# Altium PCB kd_inz_pcb.PcbDoc
Units mm, origin at the board's own origin, x right, y up, seen from the top; angles counter-clockwise.
Board outline 27 x 25 mm, 4 copper layers (Top Layer, Int1 (GND), Int2 (PWR), Bottom Layer), stack 1.369 mm thick; 54 components, 46 nets, 223 pads, 109 vias.
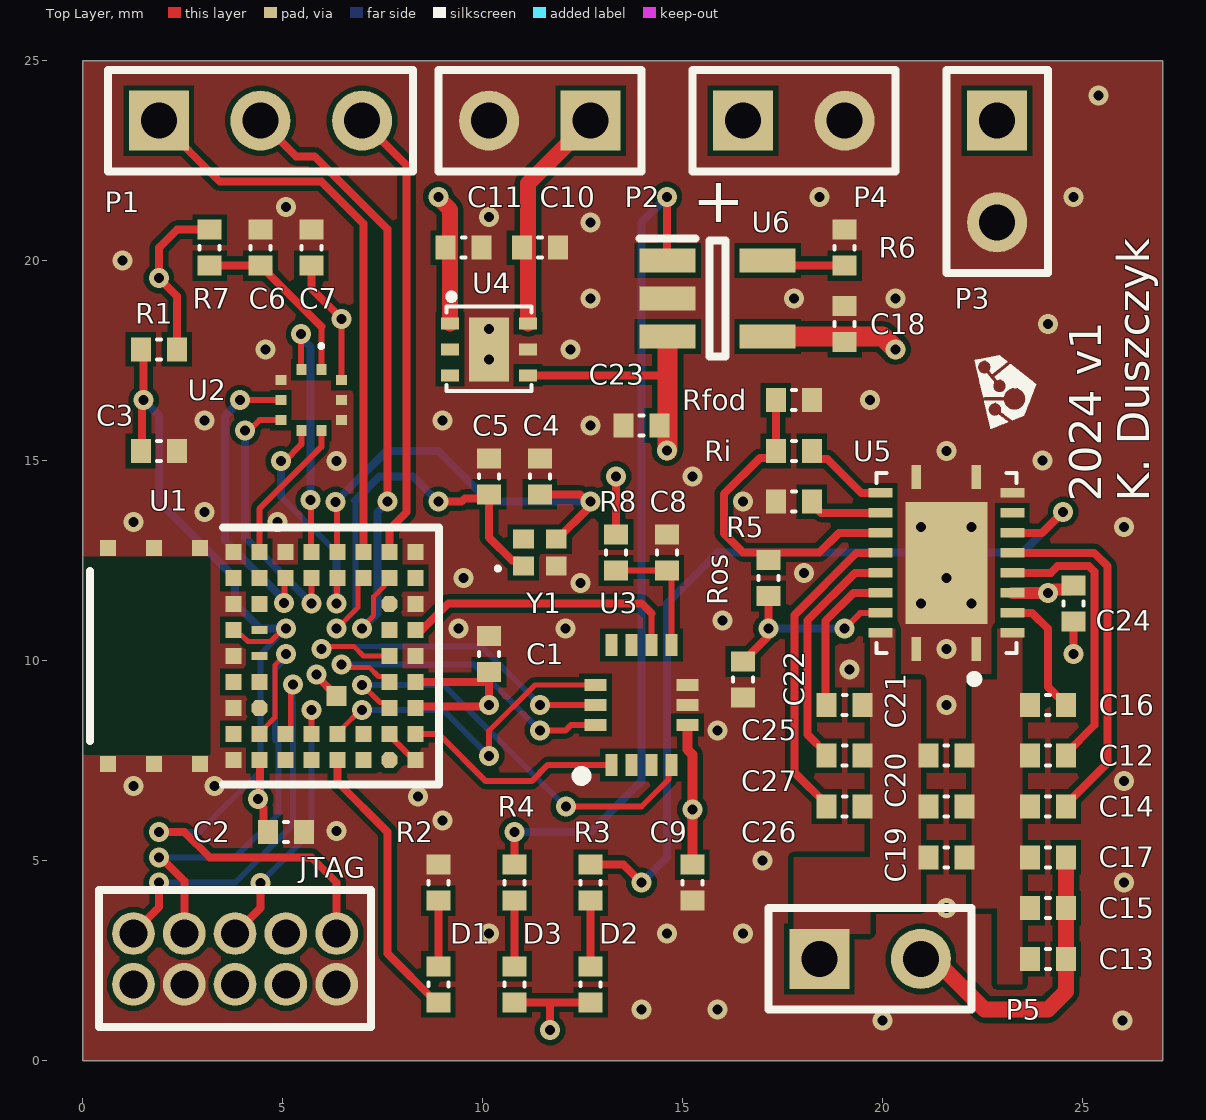
[diagram p0: Top Layer view]
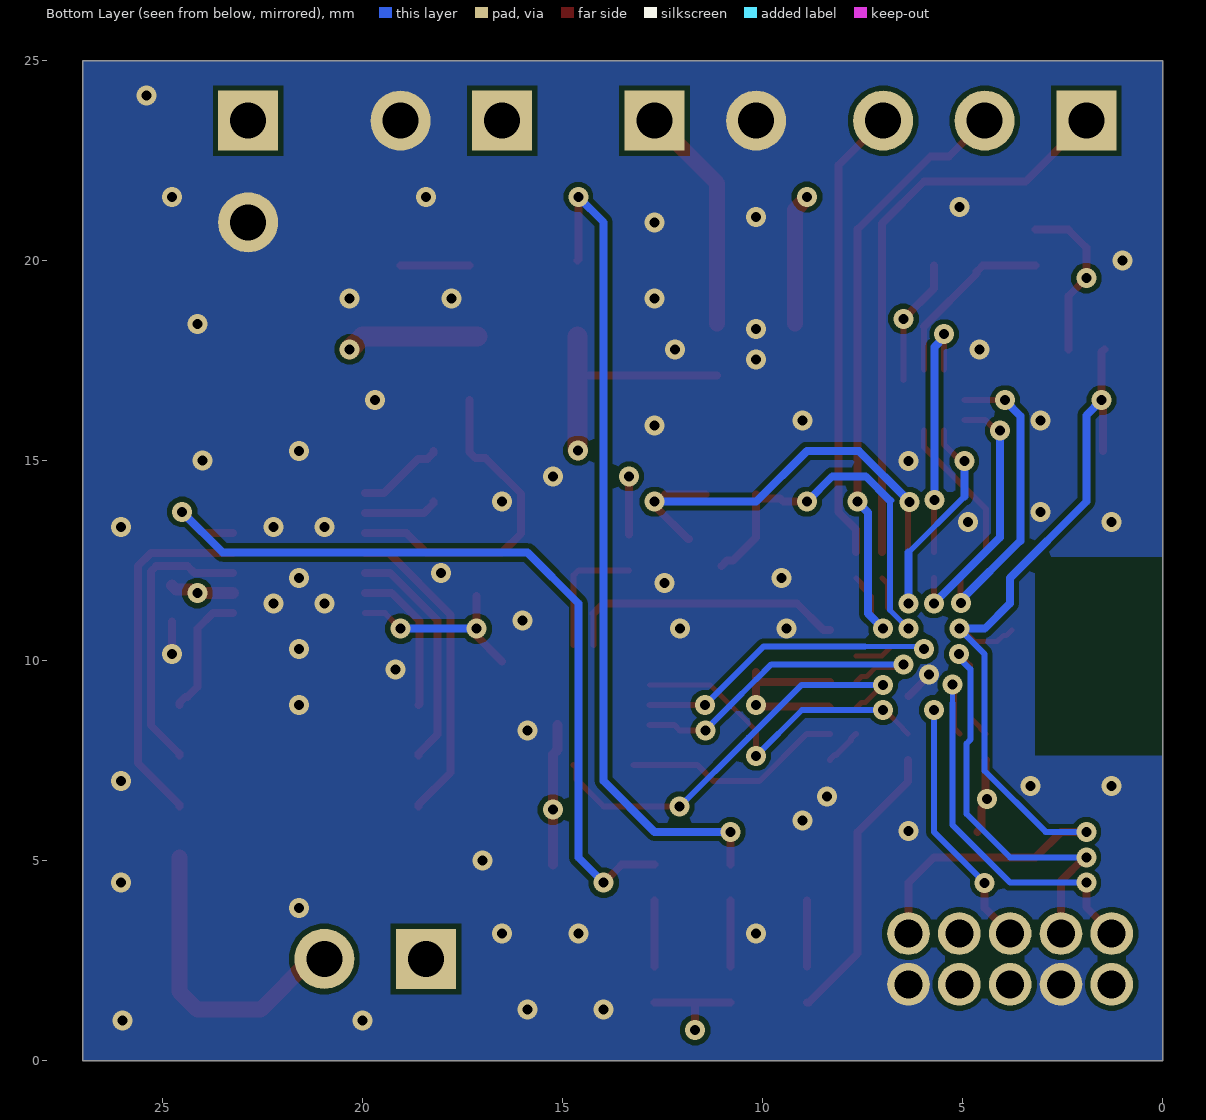
[diagram p1: Bottom Layer view, seen from below]
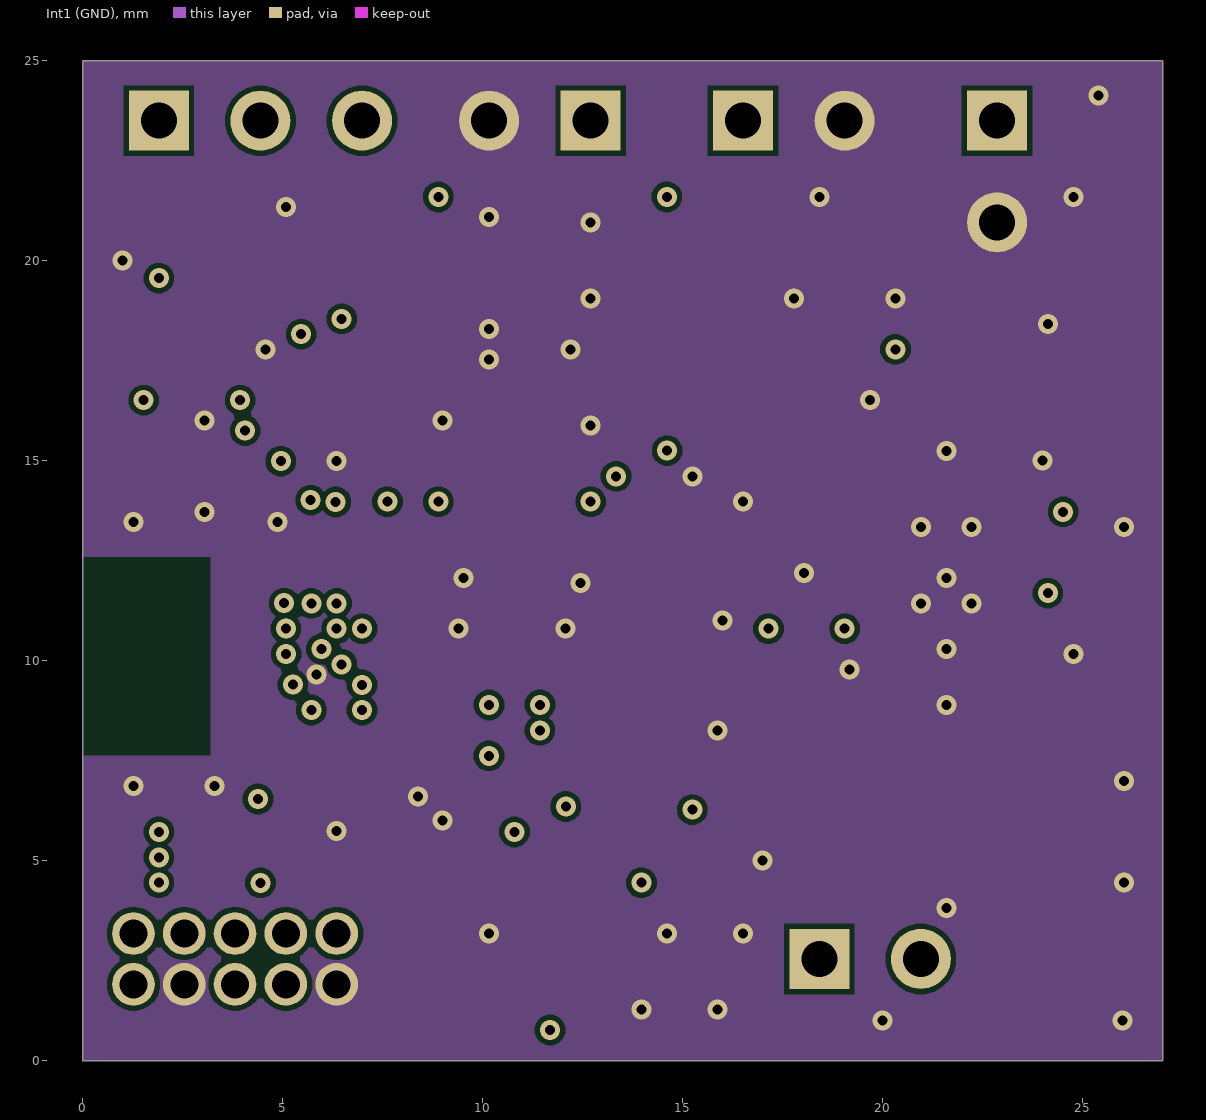
[diagram p2: Int1 (GND)]
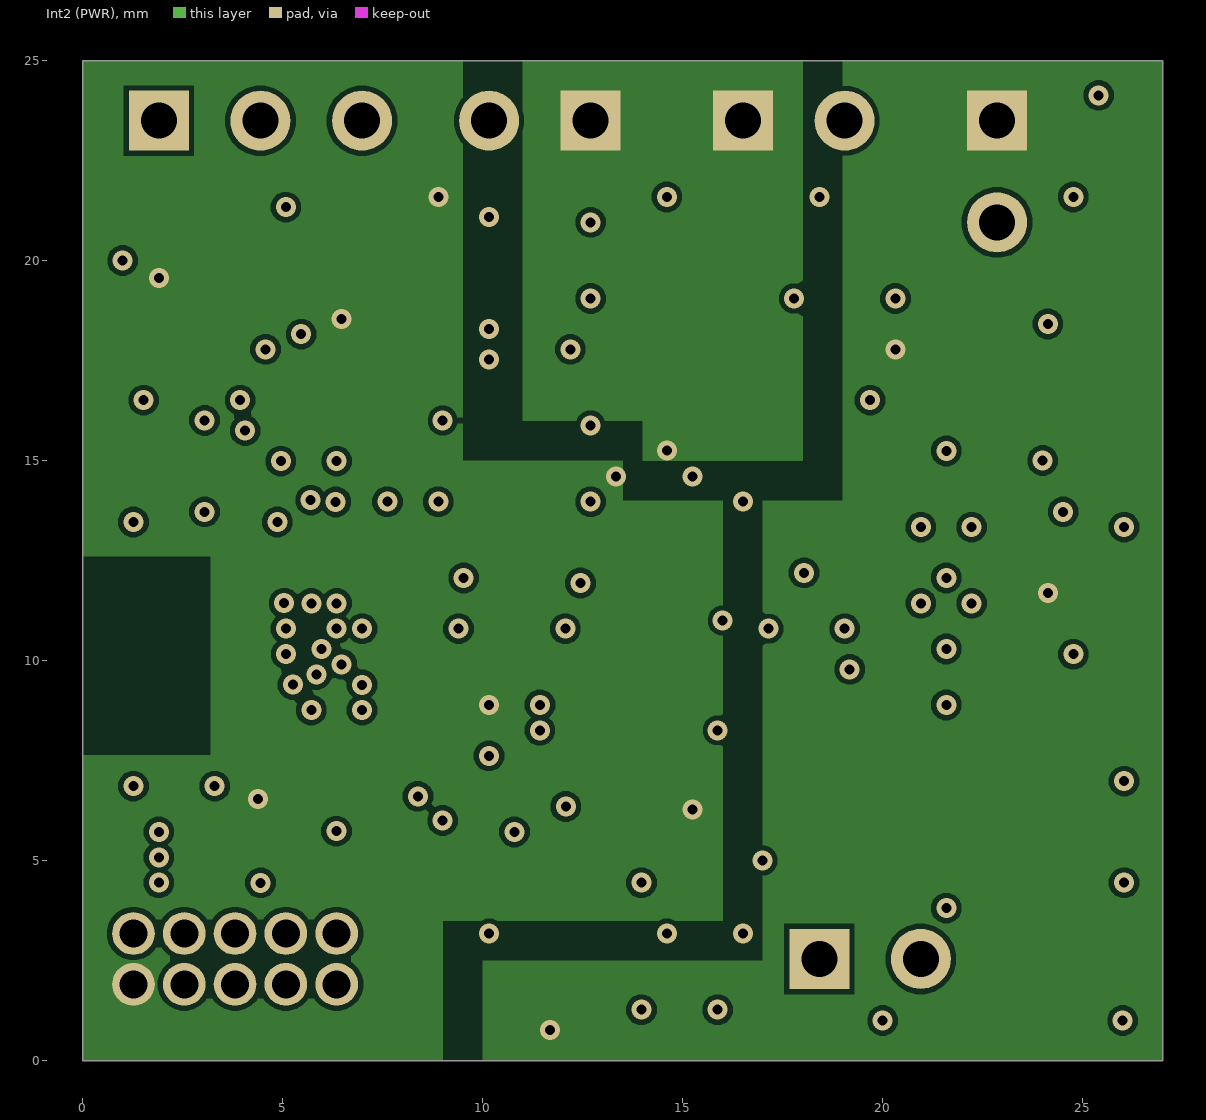
[diagram p3: Int2 (PWR)]

## Layer stack, top to bottom
Top Solder: solder mask 0.0254, SM-001, Dk 4
Top Layer: signal copper 0.035
Dielectric 2: prepreg 0.1295, PP-017, Dk 4.3
Dielectric 4: prepreg 0.1295, PP-017, Dk 4.3
Int1 (GND): signal copper 0.035
Dielectric 1: core 0.7112, Core-039, Dk 4.8
Int2 (PWR): signal copper 0.035
Dielectric 5: prepreg 0.1295, PP-017, Dk 4.3
Dielectric 3: prepreg 0.1295, PP-017, Dk 4.3
Bottom Layer: signal copper 0.035
Bottom Solder: solder mask 0.0254, SM-001, Dk 4

## Board outline
0,0 27,0 27,25 0,25

## Design rules (kind name [scope] priority, off if disabled: settings)
Clearance [All] p1: gap=0.127 ignorepadtopadclearanceinfootprint=FALSE
PolygonConnect [All] p1: connectstyle=Direct reliefconductorwidth=0.254 reliefentries=4 polygonreliefangle="90 Angle" airgapwidth=0.254
RoutingVias [All] p1: holewidth=0.711 width=1.27 viastyle="Through Hole" minholewidth=0.2 minwidth=0.5 maxholewidth=0.711 maxwidth=1.27
SolderMaskExpansion [All] p1: expansion=0.102 istentingtop=FALSE
Width [All] p1: maxlimit=1 minlimit=0.127 preferedwidth=0.3
30 further rules are at their usual default settings.

## Classes and differential pairs
component class kd_inz_supply: C10 C11 C12 C13 C14 C15 C16 C17 C18 C19 C20 C21 C22 C23 C24 C25 C26 C27 D2 D3 P2 P3 P4 P5 R3 R4 R5 R6 Rfod Ri Ros U4 U5 U6
component class kd_inz_mems: C6 C7 C8 C9 R7 R8 U2 U3
component class kd_inz_BL653: C1 C2 C3 C4 C5 D1 JTAG P1 R1 R2 U1 Y1

## Components (designator, comment, footprint, x,y, rotation, side; value= is the part's Value field where it differs from the comment)
C1 "1u" 0402 10.16,10.16 r90 top
C2 "1u" 0402 5.08,5.715 r0 top
C3 "100n" 0402 1.905,15.24 r0 top
C4 "12p" 0402 11.43,14.605 r90 top
C5 "12p" 0402 10.16,14.605 r90 top
C6 "100n" 0402 4.445,20.32 r270 top
C7 "100n" 0402 5.715,20.32 r90 top
C8 "100n" 0402 14.605,12.7 r90 top
C9 "100n" 0402 15.24,4.445 r270 top
C10 "10u" 0402 11.43,20.32 r0 top
C11 "10u" 0402 9.525,20.32 r0 top
C12 "0u47" 0402 24.13,7.62 r0 top
C13 "C1" 0402 24.13,2.54 r0 top
C14 "22n" 0402 24.13,6.35 r180 top
C15 "C1" 0402 24.13,3.81 r0 top
C16 "10n" 0402 24.13,8.89 r180 top
C17 "C1" 0402 24.13,5.08 r0 top
C18 "4u7" 0402 19.05,18.415 r90 top
C19 "C2" 0402 21.59,5.08 r180 top
C20 "C2" 0402 21.59,6.35 r180 top
C21 "C2" 0402 21.59,7.62 r180 top
C22 "10u" 0402 16.51,9.525 r270 top
C23 "4u7" 0402 13.97,15.875 r180 top
C24 "1u" 0402 24.765,11.43 r270 top
C25 "10n" 0402 19.05,8.89 r0 top
C26 "22n" 0402 19.05,6.35 r0 top
C27 "0u47" 0402 19.05,7.62 r0 top
D1 "Debug LED" 0402 8.89,1.905 r90 top
D2 "Qi LED" 0402 12.7,1.905 r90 top
D3 "MCP LED" 0402 10.795,1.905 r90 top
JTAG "Cortex Debug Conn_UART" "Cortex Debug Connector - THT" 3.81,2.54 r90 top
P1 "UART Header" HDR1X3 1.905,23.495 r0 top
P2 "Emergency charger input" HDR1X2 12.7,23.495 r180 top
P3 "Emergency charger input" HDR1X2 22.86,23.495 r270 top
P4 "Battery" BAT-2 17.78,23.495 r0 top
P5 "RX Coil" HDR1X2 18.415,2.54 r0 top
R1 "100k" 0402 1.905,17.78 r0 top
R2 "470" 0402 8.89,4.445 r90 top
R3 "100" 0402 12.7,4.445 r90 top
R4 "470" 0402 10.795,4.445 r90 top
R5 "10k" 0402 17.78,13.97 r180 top
R6 "15k" 0402 19.05,20.32 r270 top
R7 "56" 0402 3.175,20.32 r270 top
R8 "56" 0402 13.335,12.7 r270 top
Rfod "196" 0402 17.78,16.51 r180 top
Ri "845" 0402 17.78,15.24 r0 top
Ros "20k" 0402 17.145,12.065 r270 top
U1 "BL653u" FP-453-00059R-MFG 4.545,10.115 r90 top
U2 "BMP390" BMP390 5.715,16.51 r0 top
U3 "BMI270" QFN50P300X250X87-14N 13.97,8.89 r90 top
U4 "LP5912-3.3DRVR" WSON-6 10.16,17.78 r0 top
U5 "BQ51013BRHLR" BQ51050BRHLR 21.59,12.065 r180 top
U6 "MCP73831T-2ACI_OT" SOT95P270X145-5N 15.875,19.05 r0 top
Y1 "ECS-.327-12.5--1210B-N-TR" ECS3271251210BNTR 11.43,12.7 r0 top

## Footprints (in the part's own frame and the unit in brackets; to place one, negate y for a bottom-side part, rotate by r counter-clockwise, add the part's x,y. Pads: shape width x height; smd on the part's side, far side on the other; paste and mask are expansions set on the pad)
0402 [mm]
  rect 0.5x0.6 smd: 1(0.45,0) 2(-0.45,0)
  silkscreen extent -0.05,-0.25 0.05,0.25
BAT-2 [mm] "Battery; 2 Leads"
  rect 1.5x1.5 hole 0.9: 1(-1.27,0)
  round 1.5 hole 0.9: 2(1.27,0)
  silkscreen extent -2.54,-1.27 2.54,1.27
BMP390 [mm]
  rect 0.25x0.275 smd: 1(0.25,0.763) 2(-0.25,0.763) 6(-0.25,-0.763) 7(0.25,-0.763)
  rect 0.275x0.25 smd: 3(-0.762,0.5) 4(-0.762,0) 5(-0.762,-0.5) 8(0.762,-0.5) 9(0.762,0) 10(0.762,0.5)
  silkscreen extent 0.2,1.3 0.3,1.4, body extent -1,-1.08 1,0.92, height 0.73
BQ51050BRHLR [mm]
  rect 0.24x0.6 smd: 1(-0.75,1.775) 10(-0.75,-2.525) 11(0.75,-2.525) 20(0.75,1.775)
  rect 0.6x0.24 smd: 2(-1.65,1.375) 3(-1.65,0.875) 4(-1.65,0.375) 5(-1.65,-0.125) 6(-1.65,-0.625) 7(-1.65,-1.125) 8(-1.65,-1.625) 9(-1.65,-2.125) 12(1.65,-2.125) 13(1.65,-1.625) 14(1.65,-1.125) 15(1.65,-0.625) 16(1.65,-0.125) 17(1.65,0.375) 18(1.65,0.875) 19(1.65,1.375)
  rect 2.05x3.05 smd: 21(0,-0.375)
  silkscreen extent -1.75,-2.63 1.75,2.62, body extent -1.75,-2.67 1.75,1.83, height 1
"Cortex Debug Connector - THT" [mm]
  round 1.067 hole 0.7: 1(-0.635,2.54) 2(0.635,2.54) 3(-0.635,1.27) 4(0.635,1.27) 5(-0.635,0) 6(0.635,0) 7(-0.635,-1.27) 8(0.635,-1.27) 9(-0.635,-2.54) 10(0.635,-2.54)
  silkscreen extent -1.7,-3.4 1.73,3.4
ECS3271251210BNTR [mm]
  rect 0.52x0.47 smd: 1(-0.41,-0.335) 2(0.41,-0.335) 3(0.41,0.335) 4(-0.41,0.335)
  silkscreen extent -1.1,-0.45 -1,-0.35, body extent -0.62,-0.52 0.62,0.52, height 0.45
FP-453-00059R-MFG [mm]
  rect 0.4x0.4 smd paste+0 mask+0: 1(-2.6,0.78) 2(-1.95,0.78) 3(-1.3,0.78) 4(-0.65,0.78) 5(0,0.78) 6(0.65,0.78) 7(1.3,0.78) 8(1.95,0.78) 9(2.6,0.78) 10(2.6,0.13) 11(2.6,-0.52) 12(2.6,-1.17) 13(2.6,-1.82) 14(2.6,-2.47) 15(2.6,-3.12) 16(2.6,-3.77) 17(1.95,-3.77) 18(1.3,-3.77) 19(0.65,-3.77) 20(0,-3.77) 21(-0.65,-3.77) 22(-1.3,-3.77) 23(-1.95,-3.77) 24(-2.6,-3.77) 26(-2.6,-2.47) 27(-2.6,-1.82) 28(-2.6,-1.17) 29(-2.6,-0.52) 30(-2.6,0.13) 31(-1.95,0.13) 33(-0.65,0.13) 36(1.3,0.13) 37(1.95,0.13) 38(1.95,-0.52) 39(1.95,-1.17) 40(1.95,-1.82) 41(1.95,-2.47) 42(1.95,-3.12) 44(0.65,-3.12) 45(0,-3.12) 46(-0.65,-3.12) 47(-1.3,-3.12) 48(-1.95,-3.12) 49(-1.95,-2.47) 50(-1.95,-1.82) 51(-1.95,-1.17) 52(-1.95,-0.52) G2(2.7,3.91) G3(2.7,2.76) G4(2.7,1.61) G5(-2.7,1.61) G6(-2.7,2.76) G7(-2.7,3.91)
  oct 0.4x0.4 smd paste+0 mask+0: 25(-2.6,-3.12) 32(-1.3,0.13) 43(1.3,-3.12)
  rect 0.203x0.4 smd paste+0 mask+0: 34(0,0.13) 35(0.65,0.13)
  rect 0.5x0.5 smd paste+0 mask+0: G1(-1,-1.8)
  silkscreen extent -3.21,-4.37 3.21,4.37
HDR1X2 [mm] "Connector; Header; 2 Position"
  rect 1.5x1.5 hole 0.9: 1(0,0)
  round 1.5 hole 0.9: 2(2.54,0)
  silkscreen extent -1.27,-1.27 3.81,1.27
HDR1X3 [mm] "Connector; Header; 3 Position"
  rect 1.5x1.5 hole 0.9: 1(0,0)
  round 1.5 hole 0.9: 2(2.54,0) 3(5.08,0)
  silkscreen extent -1.27,-1.27 6.35,1.27
QFN50P300X250X87-14N [mm]
  rect 0.55x0.3 smd: 1(-1.5,0.75) 2(-1.5,0.25) 3(-1.5,-0.25) 4(-1.5,-0.75) 8(1.5,-0.75) 9(1.5,-0.25) 10(1.5,0.25) 11(1.5,0.75)
  rect 0.3x0.55 smd: 5(-0.5,-1.15) 6(0,-1.15) 7(0.5,-1.15) 12(0.5,1.15) 13(0,1.15) 14(-0.5,1.15)
  silkscreen extent -1.9,1.37 -1.65,1.62, body extent -1.55,-1.3 1.55,1.3, height 0.87
SOT95P270X145-5N [mm]
  rect 1.4x0.6 smd: 1(-1.25,0.95) 2(-1.25,0) 3(-1.25,-0.95) 4(1.25,-0.95) 5(1.25,0.95)
  silkscreen extent -1.95,-1.45 0.2,1.5, body extent -1.35,-1.45 1.35,1.45, height 1.45
WSON-6 [mm]
  rect 0.45x0.3 smd: 1(-0.975,0.65) 2(-0.975,0) 3(-0.975,-0.65) 4(0.975,-0.65) 5(0.975,0) 6(0.975,0.65)
  rect 1x1.6 smd: 7(0,0)
  silkscreen extent -1.07,-1.04 1.07,1.4

## Part data
C1 C2 C3 C4 C5 C6 C7 C8 C9 C10 C11 C12 C13 C14 C15 C16 C17 C18 C19 C20 C21 C22 C23 C24 C25 C26 C27: library part C, "Capacitor"
D1 D2 D3: library part LED
P1: library part "Header 3", "Header, 3-Pin", LatestRevisionDate=17-Jul-2002, LatestRevisionNote="Re-released for DXP Platform.", Publisher="Altium Limited"
P2 P3 P5: library part "Header 2", "Header, 2-Pin", LatestRevisionDate=17-Jul-2002, LatestRevisionNote="Re-released for DXP Platform.", Publisher="Altium Limited"
P4: "Multicell Battery", LatestRevisionDate=17-Jul-2002, LatestRevisionNote="Re-released for DXP Platform.", PackageDescription="Battery; 2 Leads", PackageReference=BAT-2, Published=24-Mar-1999, Publisher="Altium Limited"
R1 R2 R3 R4 R5 R6 R7 R8 Rfod Ri Ros: library part R, "Resistor"
U1: "BL653 MOD INTEGRATED ANT"
U2: "Integrated Circuit", Manufacturer_Name=BOSCH, Mouser Part Number=262-BMP390, Arrow Part Number=BMP390, Arrow Price/Stock=https://www.arrow.com/en/products/bmp390/bosch?region=nac, Datasheet Link=https://www.bosch-sensortec.com/media/boschsensortec/downloads/datasheets/bst-bmp390-ds002.pdf, Height=0.8mm, Manufacturer_Part_Number=BMP390, Mouser Price/Stock=https://www.mouser.co.uk/ProductDetail/Bosch-Sensortec/BMP390?qs=QNEnbhJQKvYQVfvRMgo2YA%3D%3D
U3: "Integrated Circuit", Manufacturer_Name=BOSCH, Mouser Part Number=262-BMI270, Arrow Part Number=BMI270, Arrow Price/Stock=https://www.arrow.com/en/products/bmi270/bosch?region=nac, Datasheet Link=https://www.mouser.de/datasheet/2/783/BST-BMI270-FL000-1530947.pdf, Height=0.87mm, Manufacturer_Part_Number=BMI270, Mouser Price/Stock=https://www.mouser.co.uk/ProductDetail/Bosch-Sensortec/BMI270?qs=u16ybLDytRYIj%252BjQEee88A%3D%3D
U4: library part LP5912
U5: "Integrated Circuit", Manufacturer_Name="Texas Instruments", Mouser Part Number=595-BQ51013BRHLR, Arrow Part Number=BQ51013BRHLR, Arrow Price/Stock=https://www.arrow.com/en/products/bq51013brhlr/texas-instruments?region=nac, Datasheet Link=http://www.ti.com/lit/ds/symlink/bq51013b.pdf, Manufacturer_Part_Number=BQ51013BRHLR, Mouser Price/Stock=https://www.mouser.co.uk/ProductDetail/Texas-Instruments/BQ51013BRHLR?qs=y1vSg4rOnUJlN8ZPg6D5Pw%3D%3D
U6: "Integrated Circuit", Arrow Part Number=MCP73831T-2ACI/OT, Manufacturer_Name=Microchip, Mouser Part Number=579-MCP73831T-2ACIOT, Arrow Price/Stock=https://www.arrow.com/en/products/mcp73831t-2aciot/microchip-technology?region=nac, Datasheet Link=http://ww1.microchip.com/downloads/en/DeviceDoc/20001984g.pdf, Height=1.45mm, Manufacturer_Part_Number=MCP73831T-2ACI/OT, Mouser Price/Stock=https://www.mouser.co.uk/ProductDetail/Microchip-Technology/MCP73831T-2ACI-OT?qs=yUQqVecv4qvbBQBGbHx0Mw%3D%3D
Y1: "Crystal or Oscillator", Manufacturer_Name=ECS, Datasheet Link=https://4donline.ihs.com/images/VipMasterIC/IC/ECSI/ECSI-S-A0011101861/ECSI-S-A0011101861-1.pdf?hkey=EF798316E3902B6ED9A73243A3159BB0, Height=0.35mm, Manufacturer_Part_Number=ECS-.327-12.5--1210B-N-TR

## Via types
v1: diameter 0.5, hole 0.25, Top Layer to Bottom Layer, tented both sides, 109 vias

## Nets (pads, with @x,y where several pads share a name; then routed paths per layer and width w, separated by ;. In a path a pad name is that pad's centre, name@x,y a point inside that pad or via, vN(x,y) a via of type N, cw(c..) or ccw(c..) an arc to the next point about the centre after c; other vN are vias at no path point)
3V3: C1.2 C2.2 C7.2 C9.2 C11.2 JTAG.1 R1.1 R7.2 R8.2 U1.21 U1.22 U1.30 U2.10 U3.5 U4.1 | length 22.1
  Top Layer w0.15: U2.10 v1(6.477,18.542)
  Top Layer w0.2: R1.1 2.355,19.108 v1(1.905,19.558) 1.905,20.32 2.355,20.77 R7.2 ; v1@4.318,6.523 4.526,6.315 4.526,5.819 C2.2 ; v1(4.384,6.538) 4.43,6.585 4.43,7.5 U1.30 ; C7.2 5.715,19.304 v1(6.477,18.542) ; U1.22 8.353,8.852 10.122,8.852 v1(10.16,8.89) C1.2@10.16,9.465 ; U1.21 10.093,9.465 10.16,9.532 C1.2 ; R8.2 v1(13.335,14.605)
  Top Layer w0.25: U3.5 15.12,7.771 15.24,7.651 C9.2
  Top Layer w0.4: v1(8.89,21.59) 8.89,21.563 9.185,21.268 U4.1
  other v1: 15.24,6.273
5V_charger_input: C18.2 C24.2 D2.2 D3.2 P3.1 U5.4 U6.4 | length 7.5
  Top Layer w0.2: D3.2 11.684,1.455 ; v1(11.684,0.762) 11.684,1.455 ; D2.2 11.684,1.455
  Top Layer w0.3: U5.4 23.243,11.687 24.127,11.687 v1(24.13,11.684) 24.184,11.684 24.28,11.78 24.665,11.78 C24.2
  Top Layer w0.5: U6.4 20,18.1 v1(20.32,17.78)
AC1: C12.2 C13.2 C14.1 C15.2 C16.1 C17.2 C19.2 C20.2 C21.2 U5.2
AC2: C19.1 C20.1 C21.1 C25.1 C26.1 C27.1 P5.1 U5.19
BMI_INT1: U1.47 U3.4 | length 10.5
  Top Layer w0.127: v1(6.985,9.39) 6.993,9.39 7.431,8.951 7.528,8.951 U1.47
  Top Layer w0.15: v1(12.077,6.35) 13.97,6.35 14.645,7.025 14.645,7.315 U3.4
  Bottom Layer w0.15: v1(6.985,9.39) 9.021,9.39 10.341,8.07 10.345,8.07 12.065,6.35 v1(12.077,6.35)
BMI_INT2: U1.19 U3.9 | length 7.1
  Top Layer w0.15: U3.9 14.22,11.18
  Top Layer w0.2: U1.19 8.479,10.765 9.144,11.43 13.97,11.43 14.22,11.18
BMI_SPI_CLK: U1.45 U3.13 | length 9.3
  Top Layer w0.127: v1(5.969,10.287) 6.028,10.346 6.787,10.346 7.019,10.115 U1.45
  Top Layer w0.15: v1(11.433,8.893) 11.434,8.891 12.819,8.891 U3.13
  Bottom Layer w0.127: v1(5.969,10.287) 6.028,10.346 7.434,10.346
  Bottom Layer w0.15: 7.434,10.346 9.979,10.346 v1(11.433,8.893)
BMI_SPI_CS: U1.50 U3.12 | length 8.3
  Top Layer w0.127: U1.50 6.501,8.301 6.501,8.321 6.944,8.763 v1(6.985,8.763) ; v1(10.158,7.618) v1@10.16,7.62 ; 10.16,8.243 11.307,9.39 U3.12
  Top Layer w0.15: v1@10.16,7.62 10.16,8.243
  Bottom Layer w0.15: v1(6.985,8.763) 9.013,8.763 v1@10.156,7.62
BMI_SPI_MISO: U1.23 U3.1 | length 5.6
  Top Layer w0.15: U1.23 8.895,8.165 10.075,6.985 11.225,6.985 11.63,7.39 U3.1
BMI_SPI_MOSI: U1.46 U3.14 | length 8.5
  Top Layer w0.127: v1(6.477,9.906) 6.548,9.835 6.734,9.835 6.738,9.83 7.167,9.83 7.396,9.601 7.528,9.601 U1.46
  Top Layer w0.15: v1(11.43,8.255) 12.076,8.255 12.211,8.39 U3.14
  Bottom Layer w0.15: v1(6.477,9.906) 9.779,9.906 10.16,9.525 10.164,9.525 10.832,8.857 10.832,8.855 11.43,8.256 v1(11.43,8.255)
BMP_INT: U1.10 U2.7 | length 3.7
  Top Layer w0.15: U1.10 4.415,13.793 5.965,15.343 U2.7
BMP_SPI_CLK: U1.12 U2.2 | length 6.4
  Top Layer w0.15: v1(5.461,18.161) 5.463,18.159 5.463,17.275 U2.2 ; v1(5.701,14.011) 5.708,14.004 5.708,12.722 U1.12
  Bottom Layer w0.2: v1(5.461,18.161) 5.461,18.08 5.701,17.839 v1(5.701,14.011)
BMP_SPI_CS: U1.40 U2.6 | length 5.8
  Top Layer w0.15: v1(4.953,14.986) 5.048,14.986 5.465,15.403 U2.6 ; v1(6.35,11.43) 6.358,11.438 6.358,12.058 U1.40
  Bottom Layer w0.15: 4.953,14.097 6.35,12.7
  Bottom Layer w0.2: 4.953,14.097 v1(4.953,14.986) ; v1(6.35,11.43) 6.35,12.7
BMP_SPI_MISO: U1.39 U2.5 | length 6.6
  Top Layer w0.15: v1(4.064,15.748) 4.159,15.748 4.421,16.01 U2.5 ; v1(5.715,11.43) U1.39
  Bottom Layer w0.2: v1(4.064,15.748) 4.064,13.081 v1(5.715,11.43)
BMP_SPI_MOSI: U1.38 U2.4 | length 7.5
  Top Layer w0.15: v1(3.937,16.51) U2.4 ; v1(5.038,11.432) 5.052,11.445 5.052,12.052 U1.38
  Bottom Layer w0.2: v1(3.937,16.51) 3.937,16.497 3.556,16.116 3.556,12.994 5.038,11.511 v1(5.038,11.432)
BOOT1: C16.2 U5.3 | length 3.2
  Top Layer w0.2: U5.3 23.735,11.19 24.13,10.795 24.13,9.34 24.38,9.09 24.43,9.09 24.58,8.94 C16.2
BOOT2: C25.2 U5.17 | length 3.8
  Top Layer w0.2: C25.2 18.573,8.917 18.573,10.993 19.27,11.69 U5.17
CLAMP1: C12.1 U5.5 | length 7.1
  Top Layer w0.2: U5.5 24.204,12.19 24.371,12.357 25.159,12.357 25.292,12.224 25.292,8.382 24.58,7.67 C12.1
CLAMP2: C27.2 U5.16 | length 5.9
  Top Layer w0.2: C27.2 18.6,7.67 18.123,8.147 18.123,11.005 19.308,12.19 U5.16
COMM1: C14.2 U5.6 | length 9
  Top Layer w0.2: U5.6 25.288,12.69 25.619,12.359 25.619,7.439 24.58,6.4 C14.2
COMM2: C26.2 U5.15 | length 7.9
  Top Layer w0.2: C26.2 18.6,6.4 17.796,7.204 17.796,11.14 19.34,12.684 19.934,12.684 U5.15
GND: C1.1 C2.1 C3.1 C4.1 C5.1 C6.2 C7.1 C8.1 C9.1 C10.1 C11.1 C18.1 C22.1 C23.1 C24.1 JTAG.3 JTAG.9 P2.2 P3.2 P4.2 R2.1 R5.1 R6.2 Rfod.2 U1.1 U1.3 U1.5 U1.7 U1.9 U1.11 U1.16 U1.18 U1.20 U1.24 U1.48 U1.G1 U1.G2 U1.G3 U1.G4 U1.G5 U1.G6 U1.G7 U2.3 U2.8 U2.9 U3.6 U3.7 U4.5 U4.7 U5.1 U5.9 U5.10 U5.11 U5.20 U5.21 U6.2 Y1.2 | length 2.5
  Top Layer w0.15: v1@5.842,9.618 v1(5.842,9.652) ; U1.48 7.79,8.04 7.79,8.004 8.154,7.64 8.19,7.64 U1.24
  Top Layer w0.2: v1@5.842,9.618 U1.G1 ; C24.1 24.768,10.977 v1(24.768,10.157)
  other v1: 20,1 26,1 13.97,1.27 15.875,1.27 10.16,3.175 14.605,3.175 16.51,3.175 21.59,3.81 26.035,4.445 17,5 6.345,5.734 9,6 8.382,6.604 1.27,6.858 3.302,6.858 26.035,6.985 15.875,8.255 21.59,8.89 19.177,9.779 21.59,10.29 9.398,10.799 12.065,10.795 16,11 20.955,11.43 22.225,11.43 12.446,11.938 9.525,12.065 21.59,12.065 18.034,12.192 20.955,13.335 22.225,13.335 26.035,13.335 1.27,13.462 4.867,13.462 3.048,13.716 16.51,13.97 15.24,14.605 6.35,14.986 24,15 21.59,15.24 12.7,15.875 3.048,16.002 9,16 19.685,16.51 10.16,17.526 4.572,17.78 12.192,17.78 10.16,18.288 24.13,18.415 12.7,19.05 17.78,19.05 20.32,19.05 1,20 12.7,20.955 10.16,21.082 5.08,21.336 18.415,21.59 24.765,21.59 25.4,24.13
LED: D1.2 U1.27 | length 7.1
  Top Layer w0.2: U1.27 6.365,6.97 7.62,5.715 7.62,2.675 8.84,1.455 D1.2
NetC6_1: C6.1 R7.1 U2.1 | length 4.5
  Top Layer w0.15: U2.1 5.965,18.35
  Top Layer w0.2: R7.1 4.495,19.87 4.645,19.72 4.645,19.67 5.965,18.35
NetC8_2: C8.2 R8.1 U3.8 | length 3.2
  Top Layer w0.15: R8.1 C8.2 14.72,12.135 U3.8
NetC13_1: C13.1 C15.1 C17.1 P5.2 | length 7.4
  Top Layer w0.4: P5.2@21.28,2.54 22.55,1.27 24.13,1.27 24.58,1.72 C13.1 C15.1 C17.1
NetC22_2: C22.2 Ros.1 U5.18 | length 4.9
  Top Layer w0.15: v1(19.05,10.795) 19.438,11.183 19.933,11.183 U5.18
  Top Layer w0.2: C22.2 17.145,10.61 v1(17.145,10.795) Ros.1
  Bottom Layer w0.2: v1(17.145,10.795) v1(19.05,10.795)
NetD1_1: D1.1 R2.2 | length 1.6
  Top Layer w0.2: D1.1 R2.2
NetD2_1: D2.1 R3.2 | length 1.6
  Top Layer w0.2: D2.1 R3.2
NetD3_1: D3.1 R4.2 | length 1.6
  Top Layer w0.2: D3.1 R4.2
NetR3_1: R3.1 U5.7 | length 21
  Top Layer w0.2: R3.1 13.52,4.895 v1(13.97,4.445) ; U5.7 23.985,13.19 v1(24.511,13.716)
  Bottom Layer w0.2: v1(13.97,4.445) 14.605,5.08 14.605,11.43 15.875,12.7 23.495,12.7 v1(24.511,13.716)
NetR4_1: R4.1 U6.1 | length 21
  Top Layer w0.2: R4.1 v1(10.795,5.715) ; v1(14.605,21.59) 14.605,20.02 U6.1
  Bottom Layer w0.2: v1(10.795,5.715) 12.7,5.715 13.97,6.985 13.97,20.955 v1(14.605,21.59)
NetR5_2: R5.2 U5.13 | length 1.9
  Top Layer w0.2: R5.2 18.23,13.92 18.46,13.69 U5.13
NetR6_1: R6.1 U6.5 | length 1.7
  Top Layer w0.2: U6.5@17.33,19.87 R6.1
NetRfod_1: Rfod.1 Ri.2 Ros.2 U5.14 | length 8.3
  Top Layer w0.2: Rfod.1 17.33,15.215 17.18,15.065 16.931,15.065 16.033,14.168 16.033,13.177 16.51,12.7 18.415,12.7 18.905,13.19 U5.14
NetRi_1: Ri.1 U5.12 | length 2.2
  Top Layer w0.2: Ri.1 18.23,15.19 18.38,15.04 18.615,15.04 19.465,14.19 U5.12
NRESET: C3.2 JTAG.10 R1.2 U1.6 | length 24.9
  Top Layer w0.127: U1.6 3.901,10.629 3.98,10.629 4.136,10.473 4.694,10.473 5.016,10.795 v1(5.08,10.795)
  Top Layer w0.2: R1.2 1.524,17.711 v1(1.524,16.51) 1.489,16.475 C3.2@1.489,15.24 ; v1(1.905,5.715) 2.54,5.715 3.175,5.08 5.715,5.08 6.35,4.445 JTAG.10
  Bottom Layer w0.15: v1(1.905,5.715) 2.921,5.715 4.445,7.239 4.445,10.16 v1(5.08,10.795)
  Bottom Layer w0.2: v1(1.524,16.51) 1.905,16.129 1.905,13.97 3.81,12.065 3.81,11.43 4.445,10.795 v1(5.08,10.795)
SWDCLK: JTAG.4 U1.31 | length 12
  Top Layer w0.127: U1.31 4.551,8.301 4.551,8.321 4.805,8.575 4.805,9.05 4.806,9.881 v1@5.08,10.156
  Top Layer w0.2: v1(1.905,5.08) 1.945,5.08 2.54,4.485 JTAG.4
  Bottom Layer w0.15: v1(1.905,5.08) 3.814,5.08 4.897,6.163 4.897,7.927 4.803,8.02 4.803,9.784 5.08,10.061 v1@5.08,10.156
  other v1: 5.086,10.162
SWDIO: JTAG.2 U1.52 | length 10.3
  Top Layer w0.127: U1.52 5.201,8.301 5.201,9.344 v1(5.255,9.398)
  Top Layer w0.2: JTAG.2 1.27,3.199 1.905,3.834 v1(1.905,4.445)
  Bottom Layer w0.127: 5.255,8.938 v1(5.255,9.398)
  Bottom Layer w0.15: v1(1.905,4.445) 3.81,4.445 5.255,5.89 5.255,8.938
SWO: JTAG.6 U1.51 | length 7
  Top Layer w0.15: U1.51 v1(5.715,8.763)
  Top Layer w0.2: JTAG.6@3.811,3.176 4.445,3.81 4.445,4.441 v1(4.447,4.443)
  Bottom Layer w0.15: v1(4.447,4.443) 4.447,4.447 5.715,5.715 v1(5.715,8.763)
SYNC_PIN: P1.3 U1.15 | length 11.4
  Top Layer w0.2: P1.3 8.097,22.383 8.097,13.707 7.665,13.275 U1.15
UART_RX: P1.1 U1.14 | length 14.4
  Top Layer w0.2: P1.1 3.429,21.971 5.969,21.971 7.015,20.925 U1.14
UART_TX: P1.2 U1.42 | length 16.1
  Top Layer w0.127: v1(6.985,10.795) 6.985,10.839 7.274,11.128 7.274,11.594 7.528,11.848 7.528,11.929 U1.42
  Top Layer w0.2: P1.2 5.334,22.606 5.796,22.606 7.62,20.782 v1(7.62,13.97)
  Bottom Layer w0.2: v1(6.985,10.795) 7.366,11.176 7.366,13.703 7.62,13.957 v1(7.62,13.97)
VBAT: C10.2 C23.2 P2.1 P4.1 U4.4 U4.6 U6.3 | length 12.1
  Top Layer w0.2: U4.4 14.59,17.13 14.625,17.165
  Top Layer w0.4: U4.6 11.135,21.93 P2.1
  Top Layer w0.5: v1(14.613,15.248) 14.625,15.26 14.625,15.875 14.625,17.13 U6.3
XL1: C5.2 U1.41 Y1.1 | length 11.1
  Top Layer w0.127: v1(6.35,10.795) 6.879,11.324 6.879,11.929 U1.41
  Top Layer w0.2: v1(8.89,13.97) 9.477,13.97 9.56,14.053 10.058,14.053 C5.2 10.16,13.079 10.739,12.5 10.885,12.5 Y1.1
  Bottom Layer w0.127: v1(6.35,10.795) 6.819,11.264 ; 6.766,13.999 6.794,14.028
  Bottom Layer w0.15: 6.819,11.264 6.819,14.003
  Bottom Layer w0.2: 6.819,14.003 7.421,14.605 8.255,14.605 v1(8.89,13.97)
XL2: C4.2 U1.13 Y1.3 | length 11.4
  Top Layer w0.15: v1(6.327,13.964) 6.358,13.934 6.358,12.722 U1.13
  Top Layer w0.2: C4.2 12.434,14.155 12.619,13.97 v1(12.7,13.97) 12.643,13.913 12.643,13.813 11.865,13.035 Y1.3
  Bottom Layer w0.2: v1(6.327,13.964) 6.327,13.973 7.593,15.24 8.89,15.24 10.16,13.97 v1(12.7,13.97)
pads on no net: JTAG.5 JTAG.7 JTAG.8 U1.2 U1.4 U1.8 U1.17 U1.25 U1.26 U1.28 U1.29 U1.32 U1.33 U1.34 U1.35 U1.36 U1.37 U1.43 U1.44 U1.49 U3.2 U3.3 U3.10 U3.11 U4.2 U4.3 U5.8 Y1.4

## Polygon pours and split planes (outlines as drawn)
3V3 on Int2 (PWR) "3V3_L03_P007" (solid, pour order 7): 9,0 9,3.5 16,3.5 16,14 13.5,14 13.5,15 9.5,15 9.5,25 0,25 0,0
5V_charger_input on Int2 (PWR) "5V_CHARGER_INPUT_L03_P006" (solid, pour order 6): 27,25 19,25 19,14 17,14 17,2.5 10,2.5 10,0 27,0
VBAT on Int2 (PWR) "VBAT_L03_P004" (solid, pour order 4): 11,25 11,16 14,16 14,15 18,15 18,25
GND on Top Layer "GND_L01_P014" (solid, remove dead copper, pour order 14): 0,25 27,25 27,0 0,0
AC1 on Top Layer "AC1_L01_P013" (solid, pour order 13): 22.86,10.795 22.86,9.525 22.225,9.525 22.225,3.81 22.86,3.81 22.86,1.905 23.495,1.905 23.495,10.795
AC2 on Top Layer "AC2_L01_P012" (solid, pour order 12): 19.685,10.795 19.685,5.08 17.78,5.08 17.78,3.175 19.685,3.175 19.685,3.81 20.955,3.81 20.955,9.525 20.32,9.525 20.32,10.795
GND on Int1 (GND) "GND_L02_P008" (solid, pour order 8): 0,25 0,0 27,0 27,25
GND on Bottom Layer "GND_L04_P015" (solid, remove dead copper, pour order 15): 0,25 0,0 27,0 27,25

## Other copper
Top Layer:
  pour cut-out: 3.197,12.606 3.197,7.631 -0.003,7.631 -0.003,12.606
Int1 (GND):
  pour cut-out: 3.2,12.6 3.2,7.625 0,7.625 0,12.6
Int2 (PWR):
  pour cut-out: 3.197,12.603 3.197,7.628 -0.003,7.628 -0.003,12.603
Bottom Layer:
  pour cut-out: 3.2,12.6 3.2,7.625 0,7.625 0,12.6

## Silkscreen, mask and mechanical layers (free items; w line width, h text height)
Top Overlay:
  region: 2221 vertices and 0 holes, not listed, extent 22.298,15.796 23.836,17.626
  text "2024 v1 / K. Duszczyk" at 26.67,13.97 h0.8 r90

## Text inside footprints (layer, text, board x,y; h text height)
P4: Top Overlay "+" at 15.24,20.955 h1.15